# Altium PCB JacdacRgbLedGeneric 60 - StrainRelief.PcbDoc
Units mm, origin at the board's own origin, x right, y up, seen from the top; angles counter-clockwise.
Board outline 19 x 6.62 mm, 2 copper layers (Top Layer, Bottom Layer), stack 1.525 mm thick; 2 components, 15 nets, 2 pads, 0 vias.
Unrouted connection lines stored in the file: 10.
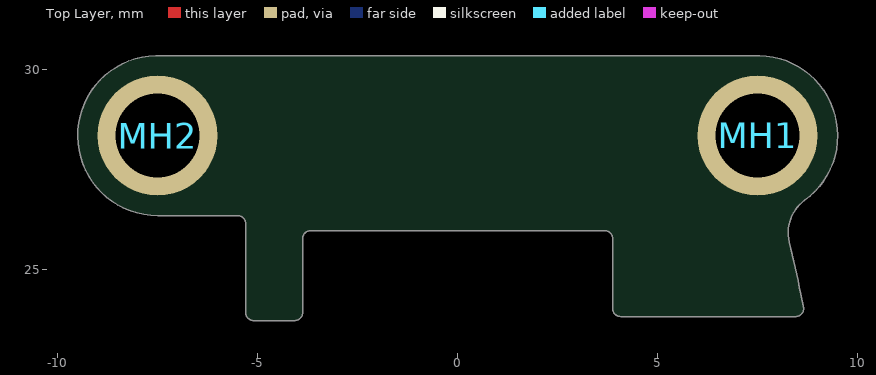
[diagram p0: Top Layer view]
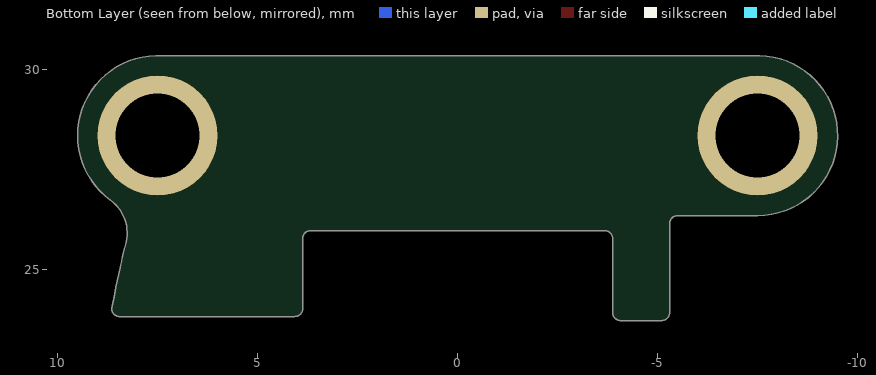
[diagram p1: Bottom Layer view, seen from below]

## Layer stack, top to bottom
Top Solder: solder mask 0.0102, Solder Resist, Dk 3.5
Top Layer: signal copper 0.0356
Dielectric 1: core 1.454, FR-4, Dk 4.2
Bottom Layer: signal copper 0.0356
Bottom Solder: solder mask 0.0102, Solder Resist, Dk 3.5

## Board outline
-5.1,23.725 -4.075,23.726 -4.075,23.725 ccw(c-4.075,23.925) -3.875,23.925 -3.875,25.775 cw(c-3.675,25.775) -3.675,25.975 3.675,25.975 cw(c3.675,25.775) 3.875,25.775 3.875,24.026 3.873,24.026 ccw(c4.073,24.026) 4.073,23.826 4.073,23.825 8.45,23.825 ccw(c8.45,24.025) 8.65,24.025 8.578,24.389 8.545,24.553 8.511,24.717 8.476,24.88 8.44,25.042 8.404,25.204 8.367,25.365 8.329,25.525 8.291,25.684 cw(c9.262,25.922) 8.675,26.731 ccw(c7.5,28.35) 7.375,30.346 -7.375,30.346 ccw(c-7.5,28.35) -7.5,26.35 -5.5,26.35 cw(c-5.5,26.15) -5.3,26.15 -5.3,23.925 ccw(c-5.1,23.925)

## Design rules (kind name [scope] priority, off if disabled: settings)
AssemblyTestPointUsage [All] p1: valid=2
BoardOutlineClearance BoardOutlineSwitchClearance [InComponent('SW1')] p1: gap=0.3 ignorepadtopadclearanceinfootprint=FALSE except(0: Arc-SplitContinuation Track-SplitContinuation SMDPad-SplitContinuation THPad-OutlineEdge THPad-SplitContinuation Via-SplitContinuation Fill-SplitContinuation Poly-SplitContinuation Region-SplitContinuation Text-SplitContinuation; 0.2: Text-OutlineEdge)
BoardOutlineClearance [All] p2: gap=0.3 ignorepadtopadclearanceinfootprint=FALSE except(0: Arc-SplitContinuation Track-CutoutEdge Track-SplitContinuation SMDPad-SplitContinuation THPad-SplitContinuation Via-SplitContinuation Fill-SplitContinuation Poly-SplitContinuation Region-OutlineEdge Region-SplitContinuation Text-OutlineEdge Text-SplitContinuation; 0.2: SMDPad-CutoutEdge; 0.25: Arc-OutlineEdge Arc-CutoutEdge Track-OutlineEdge SMDPad-OutlineEdge THPad-OutlineEdge Poly-OutlineEdge Region-CutoutEdge)
Clearance [All] p1: gap=0.125 ignorepadtopadclearanceinfootprint=FALSE except(0: Arc-Hole Track-Hole SMDPad-Hole THPad-Hole Via-Hole Fill-Hole Poly-Hole Region-Hole Text-Hole)
ComponentClearance MH5.0KeepoutaAreaClearance [InComponent('MH1') or InComponent('MH2')  or InComponent('MH3') or InComponent('MH4') vs InComponent('D6') or InComponent('D7') or InComponent('D8') or InComponent('D9') or InComponent('D10') or InComponent('D11') or InComponent('D12') or InComponent('D13') or InComponent('C6') or InComponent('C7') or InComponent('C8')  or  InComponent('C9') or  InComponent('C12') or InComponent('J3')] p1: gap=0 collisioncheckmode=3 verticalgap=0 showdistances=FALSE
ComponentClearance [All] p2: gap=0.2 collisioncheckmode=3 verticalgap=0.2 showdistances=FALSE
DiffPairsRouting [All] p1: maxlimit=2 minlimit=0.15 mostfreqgap=0.15 toplayer_minwidth=0.15 toplayer_maxwidth=2 toplayer_prefwidth=0.15 bottomlayer_minwidth=0.15 bottomlayer_maxwidth=2 bottomlayer_prefwidth=0.15 substack1={CB9D278B-8BF5-444A-AAF4-837A2A9DF42D} toplayer_{cb9d278b-8bf5-444a-aaf4-837a2a9df42d}_minwidth=0.381 toplayer_{cb9d278b-8bf5-444a-aaf4-837a2a9df42d}_maxwidth=0.381 toplayer_{cb9d278b-8bf5-444a-aaf4-837a2a9df42d}_prefwidth=0.381 bottomlayer_{cb9d278b-8bf5-444a-aaf4-837a2a9df42d}_minwidth=0.381 bottomlayer_{cb9d278b-8bf5-444a-aaf4-837a2a9df42d}_maxwidth=0.381 bottomlayer_{cb9d278b-8bf5-444a-aaf4-837a2a9df42d}_prefwidth=0.381 substack2={826B8647-A721-4255-895A-19F9591B9CD1} toplayer_{826b8647-a721-4255-895a-19f9591b9cd1}_minwidth=0.381 toplayer_{826b8647-a721-4255-895a-19f9591b9cd1}_maxwidth=0.381 toplayer_{826b8647-a721-4255-895a-19f9591b9cd1}_prefwidth=0.381 bottomlayer_{826b8647-a721-4255-895a-19f9591b9cd1}_minwidth=0.381 bottomlayer_{826b8647-a721-4255-895a-19f9591b9cd1}_maxwidth=0.381 bottomlayer_{826b8647-a721-4255-895a-19f9591b9cd1}_prefwidth=0.381 substack3={E64FCAF4-1BC8-437D-B1E0-0E5F2DC0F59E} toplayer_{e64fcaf4-1bc8-437d-b1e0-0e5f2dc0f59e}_minwidth=0.381 toplayer_{e64fcaf4-1bc8-437d-b1e0-0e5f2dc0f59e}_maxwidth=0.381 toplayer_{e64fcaf4-1bc8-437d-b1e0-0e5f2dc0f59e}_prefwidth=0.381 bottomlayer_{e64fcaf4-1bc8-437d-b1e0-0e5f2dc0f59e}_minwidth=0.381 bottomlayer_{e64fcaf4-1bc8-437d-b1e0-0e5f2dc0f59e}_maxwidth=0.381 bottomlayer_{e64fcaf4-1bc8-437d-b1e0-0e5f2dc0f59e}_prefwidth=0.381 substack4={E61CE66C-507C-4E1E-8E83-C905434AFC1C} toplayer_{e61ce66c-507c-4e1e-8e83-c905434afc1c}_minwidth=0.381 toplayer_{e61ce66c-507c-4e1e-8e83-c905434afc1c}_maxwidth=0.381 toplayer_{e61ce66c-507c-4e1e-8e83-c905434afc1c}_prefwidth=0.381 bottomlayer_{e61ce66c-507c-4e1e-8e83-c905434afc1c}_minwidth=0.381 bottomlayer_{e61ce66c-507c-4e1e-8e83-c905434afc1c}_maxwidth=0.381 bottomlayer_{e61ce66c-507c-4e1e-8e83-c905434afc1c}_prefwidth=0.381 maxuncoupledlength=25
FabricationTestPointUsage [All] p1: valid=2 allowmultiple=FALSE
HoleSize [All] p1: absolutevalues=TRUE maxlimit=2.54 minlimit=0.2 maxpercent=80.000 minpercent=20.000
MinimumSolderMaskSliver [All] p1: minsoldermaskwidth=0.005
PlaneClearance [All] p1: clearance=0.3
PlaneConnect [All] p1: planeconnectstyle=Relief reliefexpansion=0.5 reliefentries=4 reliefconductorwidth=0.2 reliefairgap=0.3
PolygonConnect "PolygonConnect GND" [isVIA] p1: connectstyle=Relief reliefconductorwidth=0.2 reliefentries=4 polygonreliefangle="90 Angle" airgapwidth=0.2
PolygonConnect [All] p2: connectstyle=Relief reliefconductorwidth=0.2 reliefentries=4 polygonreliefangle="90 Angle" airgapwidth=0.2
RoutingVias [All] p1: holewidth=0.3 width=0.6 viastyle="Through Hole" minholewidth=0.3 minwidth=0.6 maxholewidth=0.3 maxwidth=0.8
SilkToSilkClearance [All] p1: silktosilkclearance=0.001
SilkToSolderMaskClearance [IsPad] p1: minsilkscreentomaskgap=0.05 clearancetoexposedcopper=TRUE
SolderMaskExpansion [All] p1: expansion=0.075 istentingtop=FALSE
Width [All] p1: maxlimit=2 minlimit=0.15 preferedwidth=0.15 substack1={CB9D278B-8BF5-444A-AAF4-837A2A9DF42D} substack2={826B8647-A721-4255-895A-19F9591B9CD1} substack3={E64FCAF4-1BC8-437D-B1E0-0E5F2DC0F59E} substack4={E61CE66C-507C-4E1E-8E83-C905434AFC1C} minimp=50.000000 maximp=50.000000 favimp=50.000000
20 further rules are at their usual default settings.

## Components (designator, comment, footprint, x,y, rotation, side; value= is the part's Value field where it differs from the comment)
MH1 "MH_5.0MMK_3.0MMC_2.1MMD_PTH" MH_5.0MMK_3.0MMC_2.1MMD_PTH 7.5,28.35 r0 top
MH2 "MH_5.0MMK_3.0MMC_2.1MMD_PTH" MH_5.0MMK_3.0MMC_2.1MMD_PTH -7.5,28.35 r135 top

## Footprints (in the part's own frame and the unit in brackets; to place one, negate y for a bottom-side part, rotate by r counter-clockwise, add the part's x,y. Pads: shape width x height; smd on the part's side, far side on the other; paste and mask are expansions set on the pad)
MH_5.0MMK_3.0MMC_2.1MMD_PTH [mm] "Mounting Hole 5.0mm clearance, 3.1 annualar ring and 2.1mm PTH"
  round 3 hole 2.1 mask+0.05: 1(0,0)

## Part data
MH1 MH2: "Mounting Hole 5.0mm keepout, 3.0mm annualar ring and 2.1mm Drill PTH"

## Nets (pads, with @x,y where several pads share a name; then routed paths per layer and width w, separated by ;. In a path a pad name is that pad's centre, name@x,y a point inside that pad or via, vN(x,y) a via of type N, cw(c..) or ccw(c..) an arc to the next point about the centre after c; other vN are vias at no path point)
3V3: 
GND: MH1.1 MH2.1 | length 0.3
  Top Layer w0.7: MH2.1 MH2.1@-7.305,28.35
  Bottom Layer w1: MH1.1@7.5,28.214 MH1.1
JD_DATA: 
JD_DATA_MCU/SWCLK: 
JD_PWR: 
JD_STATUS: 
NetC1_2: 
NetD4_1: 
NetJ5_1: 
nRESET/RGB_CLK: 
RGB_DATA_3V3: 
RGB_DATA_5V: 
RGB_PWR: 
SWDIO: 
VUSB: 

## Silkscreen, mask and mechanical layers (free items; w line width, h text height)
Board Outline:
  lines w0.05: -8.673,26.73 cw(c-7.5,28.35) -7.489,30.35 ; -5.1,23.725 cw(c-5.1,23.925) -5.3,23.925 -5.3,26.15 ccw(c-5.5,26.15) -5.5,26.35 -7.5,26.35 cw(c-7.5,28.35) -7.375,30.346 ; -5.1,23.726 -4.075,23.726 ; -4.075,23.725 ccw(c-4.075,23.925) -3.875,23.925 -3.875,25.775 cw(c-3.675,25.775) -3.675,25.975 3.675,25.975 cw(c3.675,25.775) 3.875,25.775 3.875,24.026 ; 3.873,24.026 ccw(c4.073,24.026) 4.073,23.826 ; 4.073,23.825 8.45,23.825 ccw(c8.45,24.025) 8.65,24.025 ; -7.375,30.346 7.375,30.346 ; -7.375,30.346 7.375,30.346 ; 7.375,30.346 cw(c7.5,28.35) 8.675,26.731 ; 7.375,30.346 cw(c7.5,28.35) 8.675,26.731 ; 8.291,25.684 cw(c9.262,25.922) 8.675,26.731 ; 8.291,25.684 cw(c9.262,25.922) 8.675,26.731 ; 8.291,25.684 8.329,25.525 ; 8.291,25.684 8.329,25.525 ; 8.329,25.525 8.367,25.365 ; 8.329,25.525 8.367,25.365 ; 8.367,25.365 8.404,25.204 ; 8.367,25.365 8.404,25.204 ; 8.404,25.204 8.44,25.042 ; 8.404,25.204 8.44,25.042 ; 8.44,25.042 8.476,24.88 ; 8.44,25.042 8.476,24.88 ; 8.476,24.88 8.511,24.717 ; 8.476,24.88 8.511,24.717 ; 8.511,24.717 8.545,24.553 ; 8.511,24.717 8.545,24.553 ; 8.545,24.553 8.578,24.389 ; 8.545,24.553 8.578,24.389 ; 8.578,24.389 8.65,24.025 ; 8.578,24.389 8.65,24.025